# Altium PCB AD9833_drive.PcbDoc (part 1 of 2)
Units mil, origin at the board's own origin, x right, y up, seen from the top; angles counter-clockwise.
Board outline 3920 x 3880 mil, 2 copper layers (Top Layer, Bottom Layer); 63 components, 67 nets, 311 pads, 51 vias.
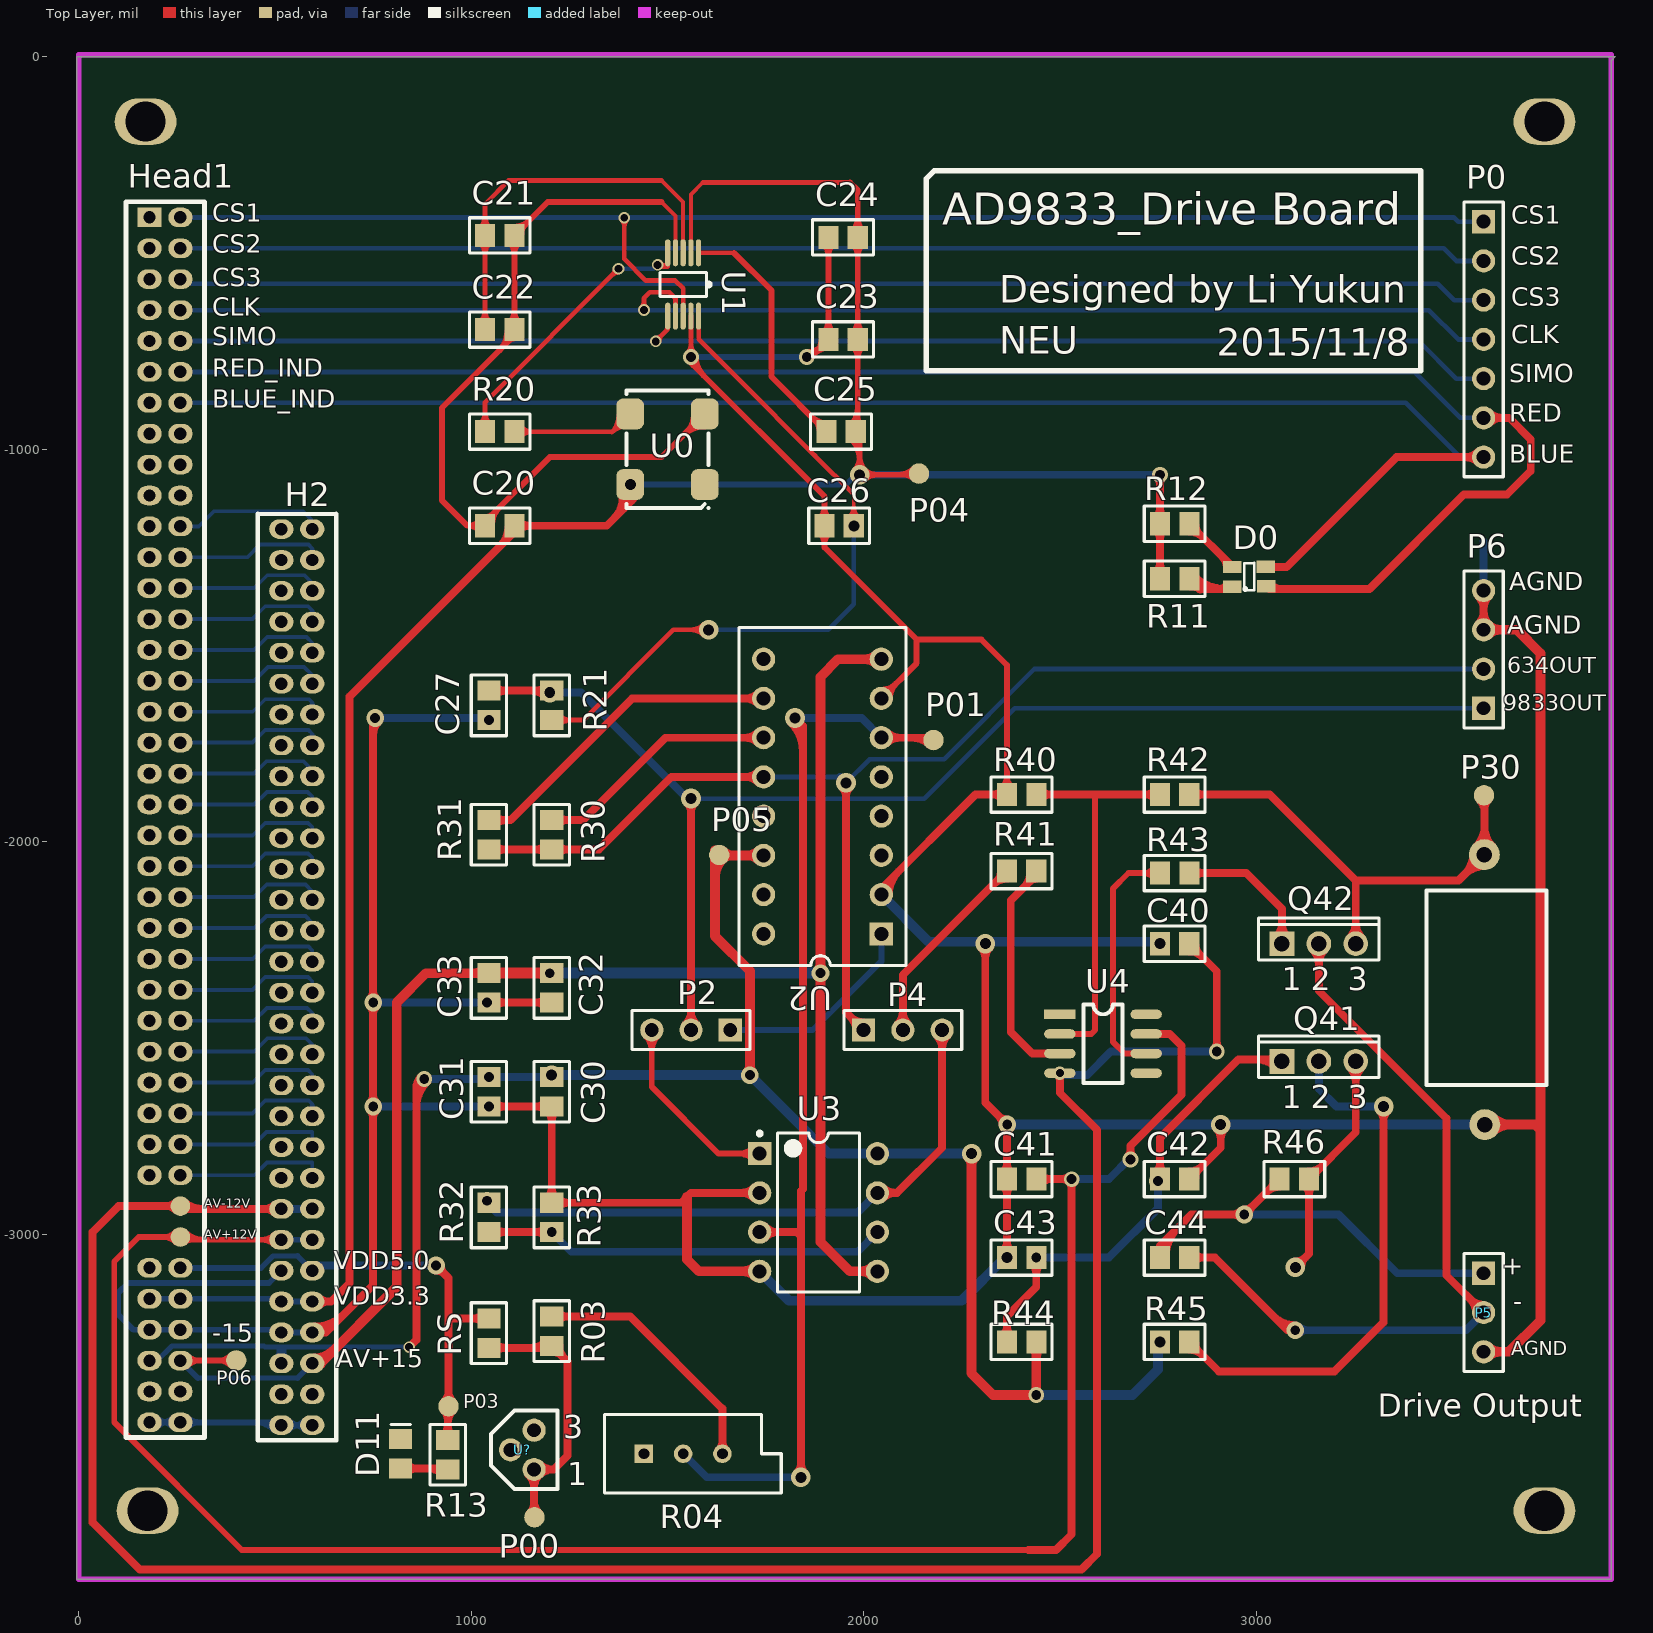
[diagram p0: Top Layer view]
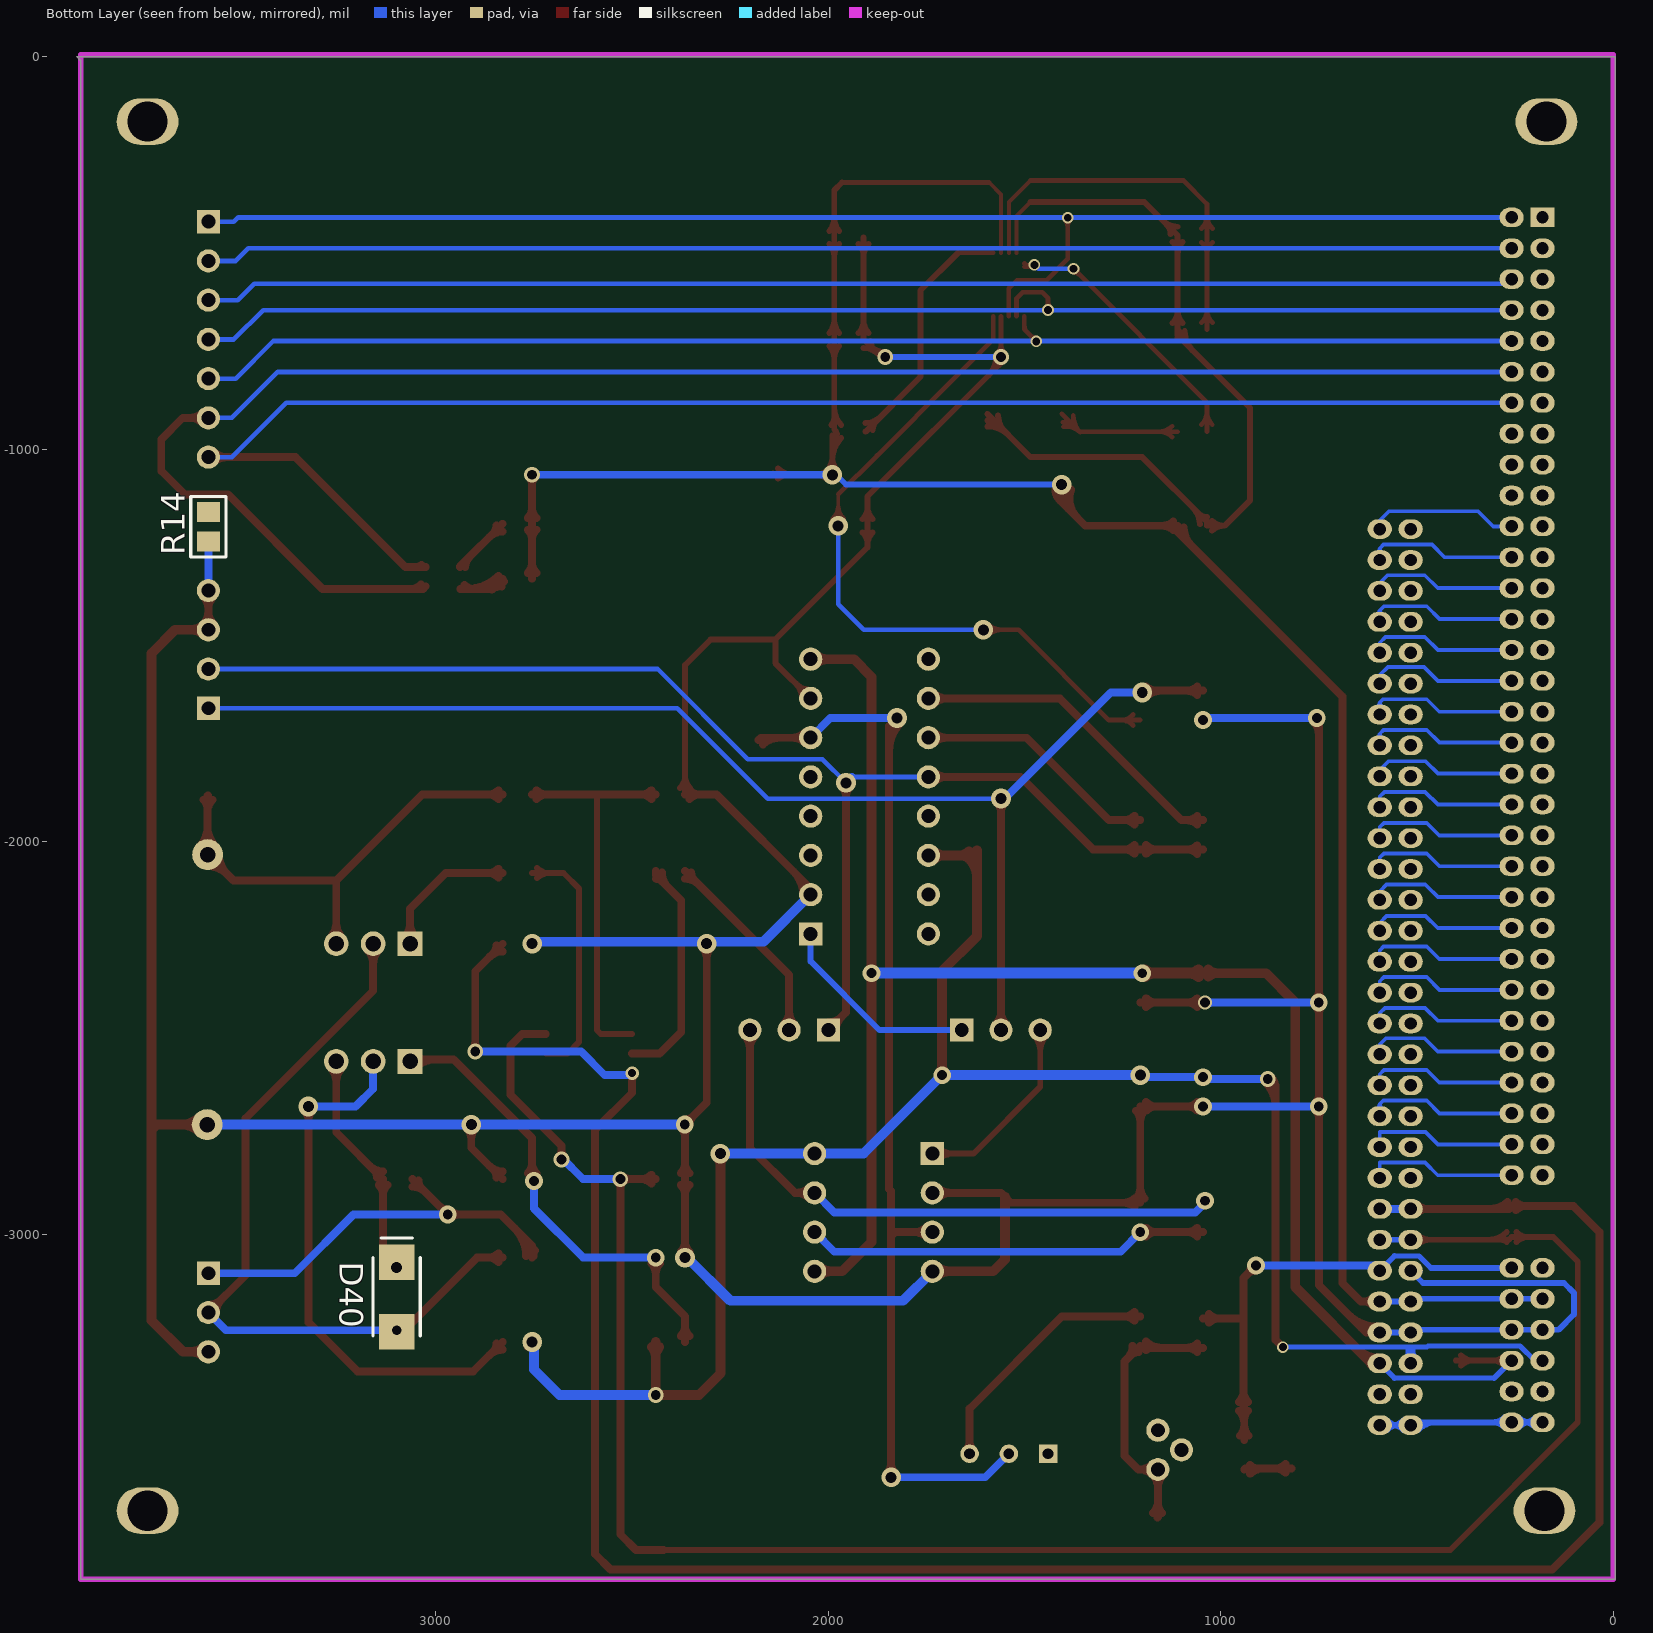
[diagram p1: Bottom Layer view, seen from below]

## Layer stack, top to bottom
Top Layer: signal copper 1.4
Dielectric: dielectric 12.6, FR-4, Dk 4.8
Bottom Layer: signal copper 1.4

## Board outline
-5,0 -5,-3880 3905,-3880 3905,-10 3915,0 -5,0

## Design rules (kind name [scope] priority, off if disabled: settings)
Clearance [All] p1: gap=6
PolygonConnect [All] p1: connectstyle=Relief reliefconductorwidth=10 reliefentries=4 polygonreliefangle="90 Angle"
RoutingVias [All] p1: holewidth=28 width=50 viastyle="Through Hole" minholewidth=25 minwidth=40 maxholewidth=28 maxwidth=50
SilkscreenOverComponentPads [All] p1: minsilkscreentomaskgap=10
SolderMaskExpansion [All] p1: expansion=4
TestPointUsage FabricationTestPointUsage [All] p1: valid=0 allowmultiple=FALSE
Testpoint FabricationTestpoint [All] p1: side=3 testpointundercomponent=TRUE minsize=40 maxsize=100 preferedsize=60 minholesize=0 maxholesize=40 preferedholesize=32 testpointgrid=1 style=297 order=0123456789
Width [All] p1: maxlimit=88.74 minlimit=8 preferedwidth=12
23 further rules are at their usual default settings.

## Classes and differential pairs
component class AD9833_drive: C20 C21 C22 C23 C24 C25 C26 C27 C30 C31 C32 C33 C40 C41 C42 C43 C44 D0 D11 D40 H2 Head1 P00 P0 P01 P2 P03 P04 P4

## Components (designator, comment, footprint, x,y, rotation, side; value= is the part's Value field where it differs from the comment)
C20 "Cap" 0805 1110,-1195 r180 top
C21 "Cap2" 0805 1035,-455 r0 top
C22 "Cap" 0805 1035,-695 r0 top
C23 "Cap2" 0805 1985,-720 r180 top
C24 "Cap" 0805 1985,-460 r180 top
C25 "Cap" 0805 1905,-955 r0 top
C26 "Cap" 0805 1900,-1195 r0 top
C27 "Cap" 0805 1045,-1690 r90 top
C30 "Cap" 0805 1205,-2674.8 r90 top
C31 "Cap" 0805 1045,-2674.8 r90 top
C32 "Cap" 0805 1205,-2410 r90 top
C33 "Cap" 0805 1045,-2410 r90 top
C40 "Cap" 0805 2755,-2260 r0 top
C41 "Cap" 0805 2440,-2860 r180 top
C42 "Cap" 0805 2755,-2860 r0 top
C43 "Cap Pol1" 0805 2440,-3060 r180 top
C44 "Cap" 0805 2755,-3060 r0 top
D0 "SML5228U1W" LED_0603˫ɫ 2940,-1300 r0 top
D11 "Alarm" LED_0805 820,-3560 r90 top
D40 "1N5817" DIODE-SMA 3100,-3160 r90 bottom
H2 "Head60" Head_60pin 500,-1900 r0 top
Head1 "Head_80" 2.0mm 120,-3520 r0 top
P00 "测试点" Text_PAD 1160,-3720 r90 top
P0 "Header 7" HDR1X7 3580,-420 r270 top
P01 "测试点" Text_PAD 2180,-1740 r0 top
P2 "Header 2" HDR1X3 1660,-2480 r180 top
P03 "测试点" Text_PAD 940,-3440 r180 top
P4 "Header 3" HDR1X3 2000,-2480 r0 top
P04 "测试点" Text_PAD 2140,-1060 r90 top
P4.0 "精密电阻 20r" RX70-0.25W 3740,-2620 r90 top
P5 "Header 3H" HDR1X3 3580,-3100 r270 top
P05 "测试点" Text_PAD 1631,-2032 r90 top
P6 "Header 3" HDR1X4 3580,-1660 r90 top
P06 "测试点" Text_PAD 400,-3320 r90 top
P30 "测试点" Text_PAD 3580,-1880 r90 top
Q41 "IRF530" TIP122 3160,-2560 r0 top
Q42 "TIP122" TIP122 3160,-2260 r0 top
R03 "100" 0805 1205,-3210 r270 top
R04 "RPot" VR5 1540,-3560 r0 top
R11 "260R" 0805 2830,-1330 r180 top
R12 "75R" 0805 2830,-1190 r180 top
R13 "330" 0805 940,-3600 r90 top
R14 "0R" 0805 3580,-1160 r270 bottom
R20 "Res2" 0805 1110,-955 r180 top
R21 "Res2" 0805 1205,-1690 r90 top
R30 "Res2" 0805 1205,-1945 r270 top
R31 "Res2" 0805 1045,-2020 r90 top
R32 "Res2" 0805 1045,-2995 r90 top
R33 "Res2" 0805 1205,-2995 r90 top
R40 "Res2" 0805 2440,-1880 r180 top
R41 "Res2" 0805 2365,-2075 r0 top
R42 "Res2" 0805 2755,-1880 r0 top
R43 "Res2" 0805 2830,-2080 r180 top
R44 "Res2" 0805 2440,-3275 r180 top
R45 "Res2" 0805 2755,-3275 r0 top
R46 "Res2" 0805 3060,-2860 r0 top
RS "1K,15mW" 0805 1045,-3290 r90 top
U0 "MCLK" X-CPX75 1500,-1000 r270 top
U1 "AD9833" MSOP_AD9833_10N 1540,-580 r270 top
U2 "MPY634" DIP-16-KEY 2045,-2235 r90 top
U3 "AD633" DIP-8 1885,-2945 r0 top
U4 "OPA07" SO-8-N 2500,-2440 r0 top
U? "LM385-1.2" TO-92 1160,-3600 r0 top

## Footprints (in the part's own frame and the unit in brackets; to place one, negate y for a bottom-side part, rotate by r counter-clockwise, add the part's x,y. Pads: shape width x height; smd on the part's side, far side on the other; paste and mask are expansions set on the pad)
2.0mm [mm]
  rect 1.57x1.27 hole 0.8: 1(1.524,79.016)
  oval 1.57x1.27 hole 0.8: 2(3.524,79.016) 3(1.524,77.016) 4(3.524,77.016) 5(1.524,75.016) 6(3.524,75.016) 7(1.524,73.016) 8(3.524,73.016) 9(1.524,71.016) 10(3.524,71.016) 11(1.524,69.016) 12(3.524,69.016) 13(1.524,67.016) 14(3.524,67.016) 15(1.524,65.016) 16(3.524,65.016) 17(1.524,63.016) 18(3.524,63.016) 19(1.524,61.016) 20(3.524,61.016) 21(1.524,59.016) 22(3.524,59.016) 23(1.524,57.016) 24(3.524,57.016) 25(1.524,55.016) 26(3.524,55.016) 27(1.524,53.016) 28(3.524,53.016) 29(1.524,51.016) 30(3.524,51.016) 31(1.524,49.016) 32(3.524,49.016) 33(1.524,47.016) 34(3.524,47.016) 35(1.524,45.016) 36(3.524,45.016) 37(1.524,43.016) 38(3.524,43.016) 39(1.524,41.016) 40(3.524,41.016) 41(1.524,39.016) 42(3.524,39.016) 43(1.524,37.016) 44(3.524,37.016) 45(1.524,35.016) 46(3.524,35.016) 47(1.524,33.016) 48(3.524,33.016) 49(1.524,31.016) 50(3.524,31.016) 51(1.524,29.016) 52(3.524,29.016) 53(1.524,27.016) 54(3.524,27.016) 55(1.524,25.016) 56(3.524,25.016) 57(1.524,23.016) 58(3.524,23.016) 59(1.524,21.016) 60(3.524,21.016) 61(1.524,19.016) 62(3.524,19.016) 63(1.524,17.016) 64(3.524,17.016) 69(1.524,11.016) 70(3.524,11.016) 71(1.524,9.016) 72(3.524,9.016) 73(1.524,7.016) 74(3.524,7.016) 75(1.524,5.016) 76(3.524,5.016) 77(1.524,3.016) 78(3.524,3.016) 79(1.524,1.016) 80(3.524,1.016)
  round 0 smd: 65(1.524,15.016) 67(1.524,13.016)
  round 1.27 smd: 66(3.524,15.016) 68(3.524,13.016)
  silkscreen extent 0,0.03 5.08,80.03
0805 [mm]
  rect 1.3x1.5 smd: 1(0,0) 2(1.9,0)
  silkscreen extent -1.02,-1.14 2.92,1.14
DIODE-SMA [mm] "贴片二极管"
  rect 2.3x2.3 smd: 1(-2.25,0) 2(2.25,0)
  silkscreen extent -2.54,-1.52 3.81,1.52, body extent -2.92,-1.4 2.92,1.4, height 3
DIP-8 [mm] "DIP; 8 Leads; Row Spacing 7.62 mm; Pitch 2.54 mm"
  rect 1.5x1.5 hole 0.9: 1(-3.81,3.81)
  round 1.5 hole 0.9: 2(-3.81,1.27) 3(-3.81,-1.27) 4(-3.81,-3.81) 5(3.81,-3.81) 6(3.81,-1.27) 7(3.81,1.27) 8(3.81,3.81)
  silkscreen extent -3.93,-5.15 2.65,5.23, body extent -3.6,-5.15 3.6,5.15, height 5.08
DIP-16-KEY [mm] "DIP; 16 Leads; Row Spacing 7.62 mm; Pitch 2.54 mm"
  rect 1.5x1.5 hole 0.9: 1(0,0)
  round 1.5 hole 0.9: 2(2.54,0) 3(5.08,0) 4(7.62,0) 5(10.16,0) 6(12.7,0) 7(15.24,0) 8(17.78,0) 9(17.78,7.62) 10(15.24,7.62) 11(12.7,7.62) 12(10.16,7.62) 13(7.62,7.62) 14(5.08,7.62) 15(2.54,7.62) 16(0,7.62)
  silkscreen extent -2.05,-1.59 19.83,9.2
HDR1X3 [mm] "Connector; Header; 3 Position"
  rect 1.5x1.5 hole 0.9: 1(0,0)
  round 1.5 hole 0.9: 2(2.54,0) 3(5.08,0)
  silkscreen extent -1.27,-1.27 6.35,1.27
HDR1X4 [mm] "Connector; Header; 4 Position"
  rect 1.5x1.5 hole 0.9: 1(0,0)
  round 1.5 hole 0.9: 2(2.54,0) 3(5.08,0) 4(7.62,0)
  silkscreen extent -1.27,-1.27 8.89,1.27
HDR1X7 [mm] "Connector; Header; 7 Position"
  rect 1.5x1.5 hole 0.9: 1(0,0)
  round 1.5 hole 0.9: 2(2.54,0) 3(5.08,0) 4(7.62,0) 5(10.16,0) 6(12.7,0) 7(15.24,0)
  silkscreen extent -1.27,-1.27 16.51,1.27
Head_60pin [mm]
  oval 1.57x1.27 hole 0.8: 21(0.406,17.69) 22(2.406,17.69) 23(0.406,15.69) 24(2.406,15.69) 25(0.406,13.69) 26(2.406,13.69) 27(0.406,11.69) 28(2.406,11.69) 29(0.406,9.69) 30(2.406,9.69) 31(0.406,7.69) 32(2.406,7.69) 33(0.406,5.69) 34(2.406,5.69) 35(0.406,3.69) 36(2.406,3.69) 37(0.406,1.69) 38(2.406,1.69) 39(0.406,-0.31) 40(2.406,-0.31) 41(0.406,-2.31) 42(2.406,-2.31) 43(0.406,-4.31) 44(2.406,-4.31) 45(0.406,-6.31) 46(2.406,-6.31) 47(0.406,-8.31) 48(2.406,-8.31) 49(0.406,-10.31) 50(2.406,-10.31) 51(0.406,-12.31) 52(2.406,-12.31) 53(0.406,-14.31) 54(2.406,-14.31) 55(0.406,-16.31) 56(2.406,-16.31) 57(0.406,-18.31) 58(2.406,-18.31) 59(0.406,-20.31) 60(2.406,-20.31) 61(0.406,-22.31) 62(2.406,-22.31) 63(0.406,-24.31) 64(2.406,-24.31) 65(0.406,-26.31) 66(2.406,-26.31) 67(0.406,-28.31) 68(2.406,-28.31) 69(0.406,-30.31) 70(2.406,-30.31) 71(0.406,-32.31) 72(2.406,-32.31) 73(0.406,-34.31) 74(2.406,-34.31) 75(0.406,-36.31) 76(2.406,-36.31) 77(0.406,-38.31) 78(2.406,-38.31) 79(0.406,-40.31) 80(2.406,-40.31)
  silkscreen extent -1.12,-41.29 3.96,18.69
LED_0603˫ɫ [mm] "贴片双色LED"
  rect 1.2x0.8 smd: A1(-0.025,-1.27) A2(-0.025,0) K1(2.184,-1.245) K2(2.159,0.025)
  silkscreen extent 0.76,-1.5 1.4,0.25
LED_0805 [mm] "贴片二极管"
  rect 1.3x1.5 smd: 1(-0.95,0) 2(0.95,0)
  silkscreen extent 1.91,-0.63 1.91,0.64
MSOP_AD9833_10N [mm] "TSSOP, 10-Leads, Body 3.0x3.0mm (max), Pitch 0.50mm, IPC Medium Density"
  oval 1.75x0.34 smd mask+0.092: 1(-2.05,1) 2(-2.05,0.5)
  oval 1.75x0.34 smd: 3(-2.05,0) 4(-2.05,-0.5) 5(-2.05,-1) 6(2.05,-1) 7(2.05,-0.5) 8(2.05,0) 9(2.05,0.5) 10(2.05,1)
  silkscreen extent -0.78,-1.5 0.78,1.78
RX70-0.25W [mm]
  round 2 hole 1: 1(14.91,4.013) 2(-2.565,3.988)
  silkscreen extent 0,0 12.6,7.77
SO-8-N [mil]
  rect 80x24 smd: 1(0,0)
  oval 80x24 smd: 2(0,-50) 3(0,-100) 4(0,-150) 5(220,-150) 6(220,-100) 7(220,-50) 8(220,0)
  silkscreen extent 60,-175 160,25
Text_PAD [mil]
  round 52.13 smd: 0(-2,-1)
TIP122 [mm]
  rect 1.6x1.6 hole 1: 1(-2.39,0)
  round 1.6 hole 1: 2(0,0) 3(2.39,0)
  silkscreen extent -3.9,-1.05 3.9,1.65
TO-92 [mm] "三极管-DS18B20-标准封装"
  round 1.5 hole 0.9: 1(0,0) 2(-1.524,1.27) 3(0,2.54)
  silkscreen extent -2.79,-1.27 1.52,3.81
VR5 [mm] "Variable Resistor, Thru-Hole; 3 Leads"
  rect 1.2x1.2 hole 0.7: 1(-2.54,0)
  round 1.2 hole 0.7: 2(0,0) 3(2.54,0)
  silkscreen extent -5.08,-2.54 6.35,2.54
X-CPX75 [mm]
  rrect50% 2x1.8 smd: 1(2.281,2.415) 2(-2.291,2.415) 3(-2.291,-2.411) 4(2.281,-2.411)
  silkscreen extent -3.81,-2.66 3.81,2.67

## Part data
C20 C21 C22 C23 C24 C25 C26 C27 C30 C31 C32 C33 C40 C41 C42 C44: "Capacitor"
C43: "Polarized Capacitor (Radial)"
D11: library part LED0, "Typical INFRARED GaAs LED"
D40: library part DIODE, "Diode"
H2: library part Head_60
P0: "Header, 7-Pin"
P2: library part "Header 3", "Header, 3-Pin"
P4: "Header, 3-Pin"
P4.0: library part "Header 2", "Header, 2-Pin"
P5: "Header, 3-Pin, Right Angle"
P6: library part "Header 4", "Header, 4-Pin"
Q41: library part NMOS-2, "N-Channel Power MOSFET"
Q42: library part NPN2, "NPN Darlington Bipolar Transistor"
R03 R11 R12 R13 R14 RS: library part RES2
R04: "Potentiometer"
R20 R21 R30 R31 R32 R33 R40 R41 R42 R43 R44 R45 R46: "Resistor"
U0: "有源晶振1MHZ ,5V"
U1: "波形发生器"
U2: library part Mpy634_DIPN_16
U3: library part AD633_DIP_8
U4: library part OP37GS, "Low-Noise, Precision, High-Speed Operational Amplifier (Avcl >= 5)"
U?: library part "LM385m-1.2 S0T-23"

## Free pads (board coordinates)
  oval 157.48x118.11 hole 102.36: 0(175,-3705) 2(170,-165) 3(3735,-165) 4(3735,-3705)

## Via types
v1: diameter 50, hole 28, Top Layer to Bottom Layer, 18 vias
v2: diameter 45, hole 25, Top Layer to Bottom Layer, 17 vias
v3: diameter 40, hole 25, Top Layer to Bottom Layer, 8 vias
v4: diameter 30, hole 20, Top Layer to Bottom Layer, 6 vias
v5: diameter 35, hole 20, Top Layer to Bottom Layer, 1 vias
v6: diameter 35, hole 25, Top Layer to Bottom Layer, 1 vias

## Nets (pads, with @x,y where several pads share a name; then routed paths per layer and width w, separated by ;. In a path a pad name is that pad's centre, name@x,y a point inside that pad or via, vN(x,y) a via of type N, cw(c..) or ccw(c..) an arc to the next point about the centre after c; other vN are vias at no path point)
1.2VREF: P00.0 R03.2 RS.1 U?.1 | length 1067.2
  Top Layer w20: RS.1@1045,-3290 1199.8,-3290 R03.2@1205,-3284.8 1245,-3324.8 1245,-3565 1210,-3600 U?.1@1160,-3600 1160,-3721 P00.0@1161,-3722 ; RS.1@1059.96,-3301.02 cw(c1086.58,-3327.64) 1086.58,-3290 cw(c1086.58,-3252.36) RS.1@1059.96,-3278.98 ; U?.1@1146.19,-3613.81 cw(c1112.86,-3647.14) 1160,-3647.14 cw(c1207.14,-3647.14) 1173.81,-3613.81 cw(c1207.14,-3647.14) 1207.14,-3600 cw(c1207.14,-3552.86) U?.1@1173.81,-3586.19 ; P00.0@1149.64,-3710.64 ccw(c1124.63,-3685.63) 1160,-3685.63 ; 1150.88,-3290 ccw(c1150.88,-3234.62) R03.2@1190.04,-3273.78 ; 1160,-3680.81 ccw(c1202.19,-3680.81) P00.0@1172.36,-3710.64 ; R03.2@1175.97,-3290 cw(c1175.97,-3309.9) R03.2@1190.04,-3295.83 ; R03.2@1208.94,-3300.39 cw(c1208.94,-3328.53) R03.2@1228.83,-3308.63 ; R03.2@1224.53,-3284.8 ccw(c1271.67,-3284.8) 1238.34,-3318.14
AD9833_IN1: P2.1 U2.1 | length 527.5
  Bottom Layer w15: P2.1@1660,-2480 1870,-2480 2045,-2305 U2.1@2045,-2235
AD9833_IN2: P2.3 U3.1 | length 657.5
  Top Layer w15: P2.3@1444.42,-2495.58 cw(c1406.82,-2533.18) 1460,-2533.18 cw(c1513.18,-2533.18) P2.3@1475.58,-2495.58 ; P2.3@1460,-2480 1460,-2625 1630,-2795 U3.1@1735,-2795 ; U3.1@1719.42,-2810.58 ccw(c1681.82,-2848.18) 1681.82,-2795 ccw(c1681.82,-2741.82) U3.1@1719.42,-2779.42
AD9833_OUT: C27.2 P2.2 P6.1 R21.2 | length 3642
  Top Layer w20: C27.2@1045,-1615.2 R21.2@1205,-1615.2 ; C27.2@1059.96,-1626.22 cw(c1086.58,-1652.83) 1086.58,-1615.2 cw(c1086.58,-1577.56) C27.2@1059.96,-1604.17 ; 1152.19,-1615.2 cw(c1152.19,-1667.81) R21.2@1189.39,-1630.61 ; 1175.38,-1615.2 ccw(c1175.38,-1595.38) R21.2@1189.39,-1609.39 ; R21.2@1190.04,-1626.22 ccw(c1163.42,-1652.83) 1163.42,-1615.2 ccw(c1163.42,-1577.56) R21.2@1190.04,-1604.17 ; v1(1200,-1620) R21.2@1200.2,-1620 ; P2.2@1546.19,-2466.19 ccw(c1512.86,-2432.86) 1560,-2432.86 ccw(c1607.14,-2432.86) P2.2@1573.81,-2466.19 ; v1@1549.39,-1900.61 cw(c1523.79,-1926.21) 1560,-1926.21 cw(c1596.21,-1926.21) v1@1570.61,-1900.61 ; P2.2@1560,-2480 v1(1560,-1890) v1@1560,-1905
  Bottom Layer w12: v1(1560,-1890) 1560.81,-1890.81 2154.19,-1890.81 2385,-1660 P6.1@3580,-1660
  Bottom Layer w20: v1(1200,-1620) 1280,-1620 v1@1545,-1885
AGND: C23.2 C24.2 C26.1 C27.1 C30.1 C31.1 C32.1 C33.1 C40.1 C41.2 C42.2 C43.2 H2.69 H2.73 H2.74 Head1.73 Head1.74 P4.0.2 P5.3 P6.3 P6.4 R14.2 R33.2 R40.2 U1.9 U2.2 U2.7 U3.2 U3.4 | length 16725
  Top Layer w12: v3@1550.1,-755.1 ccw(c1526.2,-731.2) 1560,-731.2 ccw(c1593.8,-731.2) v3@1569.9,-755.1 ; v3(1560,-765) U1.9@1560,-661.02
  Top Layer w15: v3@1557.5,-765 ccw(c1587.68,-765) 1566.34,-786.34 ; v3(1560,-765) 1560,-780 1900,-1120 C26.1@1900,-1195 1900,-1250 2135,-1485 ; v3@1572.5,-765 ccw(c1638.89,-765) 1591.95,-811.95 ; v3@1855.2,-752.5 ccw(c1855.2,-698.18) C23.2@1893.61,-736.59 ; v3@1860.2,-770 C23.2@1910.2,-720 C24.2@1910.2,-460 ; v3@1872.59,-757.6 cw(c1910.2,-795.21) C23.2@1910.2,-742.03 ; 1882.1,-748.1 ccw(c1857.94,-723.94) C23.2@1892.11,-723.94 ; C26.1@1887.21,-1211.73 cw(c1856.33,-1242.61) 1900,-1242.61 cw(c1943.67,-1242.61) C26.1@1912.79,-1211.73 ; C26.1@1887.21,-1178.27 ccw(c1856.33,-1147.39) 1900,-1147.39 ccw(c1943.67,-1147.39) C26.1@1912.79,-1178.27 ; C23.2@1897.4,-703.27 ccw(c1866.52,-672.39) 1910.2,-672.39 ccw(c1953.87,-672.39) C23.2@1922.99,-703.27 ; C24.2@1897.4,-476.73 cw(c1866.52,-507.61) 1910.2,-507.61 cw(c1953.87,-507.61) C24.2@1922.99,-476.73 ; U2.2@2045,-2135 U2.2@2045,-2120 ; U2.7@2045,-1635 2135,-1545 2135,-1485 ; U2.7@2045,-1612.97 ccw(c2045,-1559.79) 2082.6,-1597.4 ccw(c2120.21,-1635) U2.7@2067.03,-1635 ; R40.2@2352.4,-1863.27 ccw(c2321.52,-1832.39) 2365.2,-1832.39 ccw(c2408.87,-1832.39) R40.2@2377.99,-1863.27 ; R40.2@2365.2,-1880 2365.2,-1550.2 2300,-1485 2135,-1485
  Top Layer w20: H2.74@594.74,-3250.78 629.22,-3250.78 750,-3130 750,-1690 v2(755,-1685) ; H2.74@600.65,-3255.78 ccw(c600.65,-3198.86) 640.89,-3239.11 ; H2.74@600.65,-3235.78 ccw(c600.65,-3130.57) 675.04,-3204.96 ; v2@741.16,-2683.84 cw(c719.82,-2705.18) 750,-2705.18 cw(c780.18,-2705.18) v2@758.84,-2683.84 ; v2@741.16,-2666.16 ccw(c719.82,-2644.82) 750,-2644.82 ccw(c780.18,-2644.82) v2@758.84,-2666.16 ; v2@741.16,-2418.84 cw(c719.82,-2440.18) 750,-2440.18 cw(c780.18,-2440.18) v2@758.84,-2418.84 ; v2@741.16,-2401.16 ccw(c719.82,-2379.82) 750,-2379.82 ccw(c780.18,-2379.82) v2@758.84,-2401.16 ; 750,-1727.25 cw(c797.25,-1727.25) v2@763.84,-1693.84 ; C31.1@1045,-2674.8 C30.1@1205,-2674.8 R33.2@1205,-2920.2 1534.8,-2920.2 1550,-2905 1560,-2895 U3.2@1735,-2895 ; C33.1@1045,-2410 C32.1@1205,-2410 ; C33.1@1045.3,-2415.3 cw(c1058.11,-2428.11) 1058.11,-2410 cw(c1058.11,-2391.89) C33.1@1045.3,-2404.7 ; C31.1@1053.84,-2683.84 cw(c1075.65,-2705.65) 1075.65,-2674.8 ; C31.1@1053.84,-2666.16 ccw(c1074.7,-2645.3) 1074.7,-2674.8 ; C31.1@1059.96,-2685.83 cw(c1086.58,-2712.44) 1086.58,-2674.8 cw(c1086.58,-2637.17) C31.1@1059.96,-2663.78 ; C33.1@1059.96,-2421.02 cw(c1086.58,-2447.64) 1086.58,-2410 cw(c1086.58,-2372.36) C33.1@1059.96,-2398.98 ; C30.1@1190.04,-2685.83 ccw(c1163.42,-2712.44) 1163.42,-2674.8 ccw(c1163.42,-2637.17) C30.1@1190.04,-2663.78 ; C32.1@1190.04,-2421.02 ccw(c1163.42,-2447.64) 1163.42,-2410 ccw(c1163.42,-2372.36) C32.1@1190.04,-2398.98 ; R33.2@1193.98,-2909.17 ccw(c1167.36,-2882.56) 1205,-2882.56 ccw(c1242.64,-2882.56) R33.2@1216.02,-2909.17 ; C30.1@1193.98,-2685.83 cw(c1167.36,-2712.44) 1205,-2712.44 cw(c1242.64,-2712.44) C30.1@1216.02,-2685.83 ; R33.2@1219.96,-2931.22 cw(c1246.58,-2957.83) 1246.58,-2920.2 cw(c1246.58,-2882.56) R33.2@1219.96,-2909.17 ; U3.2@1721.19,-2908.81 ccw(c1687.86,-2942.14) 1687.86,-2895 ccw(c1687.86,-2847.86) U3.2@1721.19,-2881.19 ; U2.2@2045,-2120 2285,-1880 R40.2@2365.2,-1880 ; U2.2@2064.53,-2135 cw(c2147.88,-2135) 2088.94,-2076.06 ; v1@2299.39,-2270.61 cw(c2273.79,-2296.21) 2310,-2296.21 cw(c2346.21,-2296.21) v1@2320.61,-2270.61 ; v1(2310,-2260) 2310,-2665 v2(2366,-2721) 2365.2,-2721.8 C41.2@2365.2,-2860 v1(2365.2,-3060) ; v2@2353.5,-2721 ccw(c2323.32,-2721) 2344.66,-2699.66 ccw(c2366,-2678.32) v2@2366,-2708.5 ; C43.2@2354.17,-3045.04 ccw(c2327.56,-3018.42) 2365.2,-3018.42 ccw(c2402.83,-3018.42) C43.2@2376.22,-3045.04 ; C41.2@2354.17,-2874.96 cw(c2327.56,-2901.58) 2365.2,-2901.58 cw(c2402.83,-2901.58) C41.2@2376.22,-2874.96 ; C41.2@2354.17,-2845.04 ccw(c2327.56,-2818.42) 2365.2,-2818.42 ccw(c2402.83,-2818.42) C41.2@2376.22,-2845.04 ; R40.2@2354.17,-1891.02 ccw(c2327.56,-1917.64) 2327.56,-1880 ccw(c2327.56,-1842.36) R40.2@2354.17,-1868.98 ; C43.2@2354.59,-3049.39 ccw(c2328.98,-3023.79) 2365.2,-3023.79 ccw(c2401.41,-3023.79) C43.2@2375.8,-3049.39 ; v2@2357.16,-2729.84 cw(c2337.76,-2749.24) 2365.2,-2749.24 ; 2365.2,-2753.12 cw(c2398.12,-2753.12) v2@2374.84,-2729.84 ; C42.2@2829.8,-2860 2910,-2779.8 v1(2910,-2721) ; C42.2@2829.8,-2840.47 ccw(c2829.8,-2793.33) 2863.14,-2826.66 ; C42.2@2845.39,-2856.06 cw(c2873.53,-2856.06) C42.2@2853.63,-2836.17 ; v1@2899.39,-2731.61 cw(c2873.79,-2757.21) 2910,-2757.21 cw(c2946.21,-2757.21) v1@2920.61,-2731.61 ; P6.3@3566.19,-1446.19 ccw(c3532.86,-1412.86) 3580,-1412.86 ccw(c3627.14,-1412.86) P6.3@3593.81,-1446.19 ; P6.4@3566.19,-1373.81 cw(c3532.86,-1407.14) 3580,-1407.14 cw(c3627.14,-1407.14) P6.4@3593.81,-1373.81 ; P6.3@3580,-1460 P6.4@3580,-1360
  Top Layer w25: 1550,-2905 1550,-3065 1580,-3095 U3.4@1735,-3095 ; U3.4@1722.96,-3107.04 ccw(c1693.89,-3136.11) 1693.89,-3095 ccw(c1693.89,-3053.89) U3.4@1722.96,-3082.96 ; P5.3@3580,-3300 3645,-3300 3725,-3220 3725,-2735 ; P6.3@3580,-1460 3665,-1460 3725,-1520 3725,-2735 ; P4.0.2@3583,-2721 3711,-2721 3725,-2735 ; P5.3@3592.04,-3312.04 cw(c3621.11,-3341.11) 3621.11,-3300 cw(c3621.11,-3258.89) P5.3@3592.04,-3287.96 ; P6.3@3592.04,-1472.04 cw(c3621.11,-1501.11) 3621.11,-1460 cw(c3621.11,-1418.89) P6.3@3592.04,-1447.96 ; P4.0.2@3602,-2740 cw(c3647.87,-2785.87) 3647.87,-2721 cw(c3647.87,-2656.13) P4.0.2@3602,-2702
  Bottom Layer w15: H2.69@516,-3093.3 514.32,-3094.97 484.3,-3125 125,-3125 100,-3150 100,-3205 138.78,-3243.78 Head1.73@180,-3243.78 Head1.74@258.74,-3243.78 509,-3243.78 H2.73@516,-3250.78 H2.74@594.74,-3250.78 ; v3(1560,-765) v3(1855.2,-765)
  Bottom Layer w20: H2.69@495.37,-3094.97 H2.69@514.32,-3094.97 ; v2(750,-2675) v2(1045,-2675) ; v2(750,-2410) v6(1040,-2410) ; v2(755,-1685) v2@760,-1685 ; v2@765,-1690 v2@760,-1685 ; v6@1034.7,-2415.3 ccw(c1021.89,-2428.11) 1021.89,-2410 ccw(c1021.89,-2391.89) v6@1034.7,-2404.7 ; v2(1045,-1690) 1040,-1685 v2@760,-1685 ; v1@2305,-2255 v1(2310,-2260) ; P6.4@3580,-1360 R14.2@3580,-1234.8
  Bottom Layer w25: U3.4@1735,-3095 1810,-3170 2250,-3170 2360,-3060 v1(2365.2,-3060) ; U2.2@2045,-2135 2165,-2255 2305,-2255 2750,-2255 v1(2755,-2260) v1@2750,-2265 ; v2@2365,-2720 v2(2366,-2721) v1(2910,-2721) P4.0.2@3583,-2721
AV+12: C41.1 H2.67 H2.68 Head1.68 U4.7 | length 5526.4
  Top Layer w15: Head1.68@246.37,-3019.93 ccw(c216.49,-3049.81) 216.49,-3007.56 ccw(c216.49,-2965.31) Head1.68@246.37,-2995.18 ; Head1.68@271.11,-3019.93 cw(c284.09,-3032.91) 284.09,-3014.56 ; Head1.68@271.11,-2995.18 ccw(c317.89,-2948.41) 317.89,-3014.56 ; H2.67@497.72,-3026.93 ccw(c467.85,-3056.81) 467.85,-3014.56 ccw(c467.85,-2972.31) H2.67@497.72,-3002.18 ; H2.67@515.56,-3015 H2.67@516,-3014.56 265.74,-3014.56 Head1.68@258.74,-3007.56 152.44,-3007.56 90,-3070 90,-3480 415,-3805 2420,-3805
  Top Layer w20: 2420,-3805 2490,-3805 2530,-3765 v3(2530,-2860) C41.1@2440,-2860 ; C41.1@2451.02,-2871.02 cw(c2477.64,-2897.64) 2477.64,-2860 cw(c2477.64,-2822.36) C41.1@2451.02,-2848.98 ; v3@2522.93,-2852.93 cw(c2505.86,-2835.86) 2505.86,-2860 cw(c2505.86,-2884.14) 2522.93,-2867.07 cw(c2505.86,-2884.14) 2530,-2884.14 cw(c2554.14,-2884.14) v3@2537.07,-2867.07 ; v3@2672.93,-2802.93 ccw(c2655.86,-2785.86) 2680,-2785.86 ccw(c2704.14,-2785.86) v3@2687.07,-2802.93 ; v3(2680,-2810) 2680,-2775 2810,-2645 2810,-2520 2780,-2490 U4.7@2720,-2490
  Bottom Layer w15: H2.67@516,-3014.56 H2.68@594.74,-3014.56
  Bottom Layer w20: v3(2530,-2860) 2625,-2860 2680,-2805 v3(2680,-2810)
AV+15: C30.2 C31.2 H2.75 Head1.75 P05.0 R44.1 R45.1 U2.14 U3.8 | length 5368.2
  Top Layer w20: v4(841.72,-3288.28) 860,-3270 860,-2625 v3(880,-2605) ; 860,-2677.43 cw(c952.43,-2677.43) v3@887.07,-2612.07 ; 860,-2629.14 cw(c904.14,-2629.14) v3@872.93,-2597.93
  Top Layer w25: 1621,-2093.3 cw(c1691.3,-2093.3) 1641.59,-2043.59 cw(c1662.33,-2064.33) 1662.33,-2035 ; P05.0@1621,-2022 1621,-2241 1710,-2330 v2(1710,-2595) ; P05.0@1634,-2035 U2.14@1745,-2035 ; P05.0@1641.59,-2024.41 ccw(c1667.16,-1998.84) 1667.16,-2035 ; v2@1702.93,-2587.93 ccw(c1685.86,-2570.86) 1710,-2570.86 ccw(c1734.14,-2570.86) v2@1717.07,-2587.93 ; U2.14@1732.96,-2047.04 ccw(c1703.89,-2076.11) 1703.89,-2035 ccw(c1703.89,-1993.89) U2.14@1732.96,-2022.96 ; v1@2266.16,-2803.84 cw(c2244.82,-2825.18) 2275,-2825.18 cw(c2305.18,-2825.18) v1@2283.84,-2803.84 ; v1(2275,-2795) 2275,-3355 2330,-3410 v3(2440,-3410) R44.1@2440,-3275 ; R44.1@2430.74,-3288.19 cw(c2408.4,-3310.54) 2440,-3310.54 cw(c2471.6,-3310.54) R44.1@2449.26,-3288.19 ; v1(2755,-3275) R45.1@2765,-3285
  Bottom Layer w13: Head1.75@199.8,-3322.52 237.3,-3285.02 471.5,-3285.02 ; 474.76,-3288.28 v4(841.72,-3288.28)
  Bottom Layer w15: Head1.75@180,-3322.52 Head1.75@199.8,-3322.52 ; 515,-3293.28 516,-3294.28
  Bottom Layer w20: v3(880,-2605) v2@1040,-2605 ; v2(1045,-2600) v1@1200,-2600
  Bottom Layer w25: H2.75@507.16,-3320.68 ccw(c485.82,-3299.34) 516,-3299.34 ccw(c546.18,-3299.34) H2.75@524.84,-3320.68 ; H2.75@516,-3329.52 516,-3294.28 ; v1(1205,-2595) v2(1710,-2595) 1910,-2795 U3.8@2035,-2795 v1(2275,-2795) ; v3(2440,-3410) 2685,-3410 2750,-3345 2750,-3275 v1(2755,-3275)
AV-12: C40.2 H2.65 H2.66 Head1.66 U4.4 | length 6241.1
  Top Layer w20: Head1.66@248.13,-2939.42 ccw(c222.53,-2965.03) 222.53,-2928.82 ccw(c222.53,-2892.6) Head1.66@248.13,-2918.21 ; Head1.66@269.35,-2918.21 ccw(c311.85,-2875.71) 311.85,-2935.82 ; H2.65@499.49,-2946.42 ccw(c473.88,-2972.03) 473.88,-2935.82 ccw(c473.88,-2899.6) H2.65@499.49,-2925.21 ; H2.65@516,-2935.82 265.74,-2935.82 Head1.66@258.74,-2928.82 101.18,-2928.82 35,-2995 35,-3735 155,-3855 2555,-3855 2595,-3815 2595,-2735 2500,-2640 v5(2500,-2590) ; U4.4@2494.7,-2595.3 cw(c2481.89,-2608.11) 2500,-2608.11 cw(c2518.11,-2608.11) U4.4@2505.3,-2595.3 ; C40.2@2829.8,-2279.53 cw(c2829.8,-2326.67) 2863.14,-2293.34 ; C40.2@2829.8,-2260 2900,-2330.2 v3(2900,-2535) ; C40.2@2845.39,-2263.94 ccw(c2873.53,-2263.94) C40.2@2853.63,-2283.83 ; v3@2892.93,-2527.93 ccw(c2875.86,-2510.86) 2900,-2510.86 ccw(c2924.14,-2510.86) v3@2907.07,-2527.93
  Bottom Layer w20: H2.65@516,-2935.82 H2.66@594.74,-2935.82 ; v5(2500,-2590) 2500,-2595 2570,-2595 2630,-2535 v3(2900,-2535)
AV-15: C32.2 C33.2 H2.76 Head1.76 P06.0 U2.8 U3.5 | length 4970
  Top Layer w15: Head1.76@258.74,-3322.52 400.48,-3322.52 P06.0@401,-3322 ; Head1.76@277.02,-3334.89 cw(c306.89,-3364.77) 306.89,-3322.52 cw(c306.89,-3280.27) Head1.76@277.02,-3310.14 ; 354.93,-3322.52 ccw(c354.93,-3275.93) P06.0@387.87,-3308.87 ; 357.44,-3322.52 cw(c357.44,-3365.56) P06.0@387.87,-3335.13
  Top Layer w25: H2.76@600.65,-3317.02 ccw(c600.65,-3251.02) 647.31,-3297.69 ; H2.76@615.48,-3329.52 810,-3135 810,-2410 884.8,-2335.2 C33.2@1045,-2335.2 ; C33.2@1031.81,-2344.45 ccw(c1009.46,-2366.8) 1009.46,-2335.2 ccw(c1009.46,-2303.59) C33.2@1031.81,-2325.94 ; v2@1882.93,-2342.07 cw(c1865.86,-2359.14) 1890,-2359.14 cw(c1914.14,-2359.14) v2@1897.07,-2342.07 ; v2@1882.93,-2327.93 ccw(c1865.86,-2310.86) 1890,-2310.86 ccw(c1914.14,-2310.86) v2@1897.07,-2327.93 ; U3.5@2022.96,-3107.04 ccw(c1993.89,-3136.11) 1993.89,-3095 ccw(c1993.89,-3053.89) U3.5@2022.96,-3082.96 ; U2.8@2032.96,-1547.04 ccw(c2003.89,-1576.11) 2003.89,-1535 ccw(c2003.89,-1493.89) U2.8@2032.96,-1522.96 ; U3.5@2035,-3095 1965,-3095 1890,-3020 1890,-1580 1935,-1535 U2.8@2045,-1535
  Top Layer w28: H2.76@594.74,-3329.52 H2.76@615.48,-3329.52 ; C33.2@1045,-2335.2 v2(1200.2,-2335.2) C32.2@1205,-2335.2 ; C33.2@1057.13,-2343.39 cw(c1076.92,-2363.18) 1076.92,-2335.2 cw(c1076.92,-2307.21) C33.2@1057.13,-2327 ; C32.2@1192.87,-2343.39 ccw(c1173.08,-2363.18) 1173.08,-2335.2 ccw(c1173.08,-2307.21) C32.2@1192.87,-2327
  Bottom Layer w13: 303.24,-3367.02 557.24,-3367.02
  Bottom Layer w15: Head1.76@258.74,-3322.52 303.24,-3367.02 ; 557.24,-3367.02 H2.76@594.74,-3329.52
  Bottom Layer w28: v2(1200.2,-2335.2) 1889.8,-2335.2 v2(1890,-2335)
BLUD_IND: D0.K2 Head1.14 P0.7 | length 4136.2
  Top Layer w20: D0.K2@3026,-1300 3078,-1300 3358,-1020 P0.7@3580,-1020 ; D0.K2@3036.94,-1294.94 ccw(c3049.17,-1282.71) 3049.17,-1300 ; P0.7@3566.19,-1033.81 ccw(c3532.86,-1067.14) 3532.86,-1020 ccw(c3532.86,-972.86) P0.7@3566.19,-1006.19
  Bottom Layer w12: Head1.14@258.74,-881.57 3381.57,-881.57 3520,-1020 P0.7@3580,-1020
CLK: Head1.8 P0.4 U1.7 | length 3554.6
  Top Layer w12: v4@1433.64,-638.64 ccw(c1418.27,-623.27) 1440,-623.27 ccw(c1461.73,-623.27) v4@1446.36,-638.64 ; v4(1440,-645) 1440,-615 1455,-600 1505,-600 1520.32,-615.32 U1.7@1520.32,-660.71
  Bottom Layer w12: Head1.8@258.74,-645.35 3440.35,-645.35 3515,-720 P0.4@3580,-720
CS1: Head1.2 P0.1 U1.8 | length 3716.7
  Top Layer w12: v4@1383.64,-416.36 cw(c1368.27,-431.73) 1390,-431.73 cw(c1411.73,-431.73) v4@1396.36,-416.36 ; v4(1390,-410) 1390,-515 1445,-570 1520,-570 1540,-590 U1.8@1540,-660.71
  Bottom Layer w12: Head1.2@258.74,-409.13 3504.13,-409.13 3515,-420 P0.1@3580,-420
CS2: Head1.4 P0.2 | length 3334.6
  Bottom Layer w12: Head1.4@258.74,-487.87 3477.87,-487.87 3510,-520 P0.2@3580,-520
CS3: Head1.6 P0.3 | length 3343.4
  Bottom Layer w12: Head1.6@258.74,-566.61 270.13,-578 3463,-578 3505,-620 P0.3@3580,-620